# Altium PCB 0008-NSA_IR_Sync_Board.PcbDoc
Units mil, origin at the board's own origin, x right, y up, seen from the top; angles counter-clockwise.
Board outline 474 x 707 mil, 2 copper layers (Top Layer, Bottom Layer), stack 9.493 mil thick; 5 components, 5 nets, 15 pads, 1 vias.
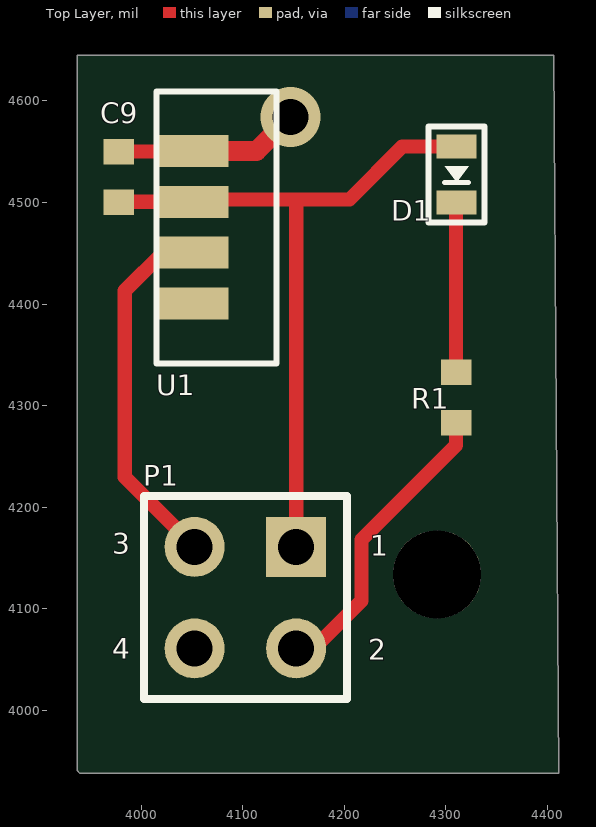
[diagram p0: Top Layer view]
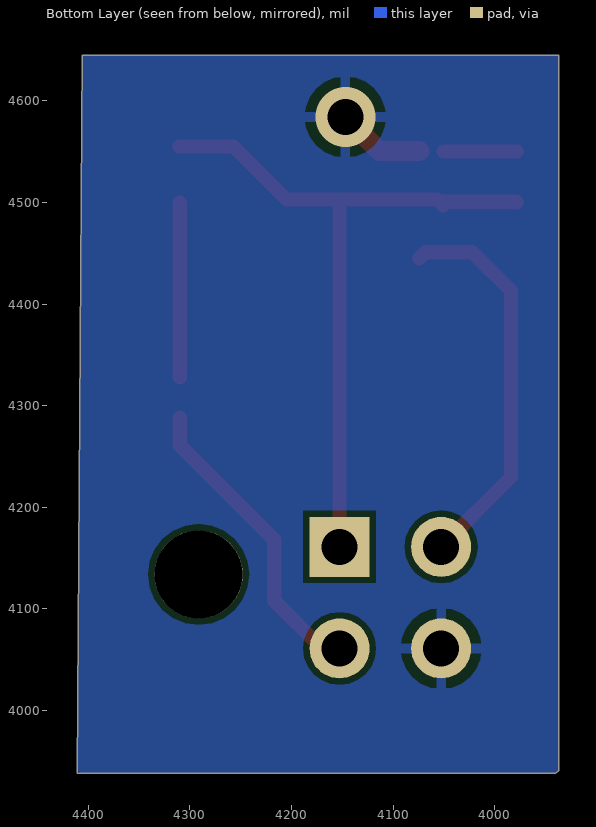
[diagram p1: Bottom Layer view, seen from below]
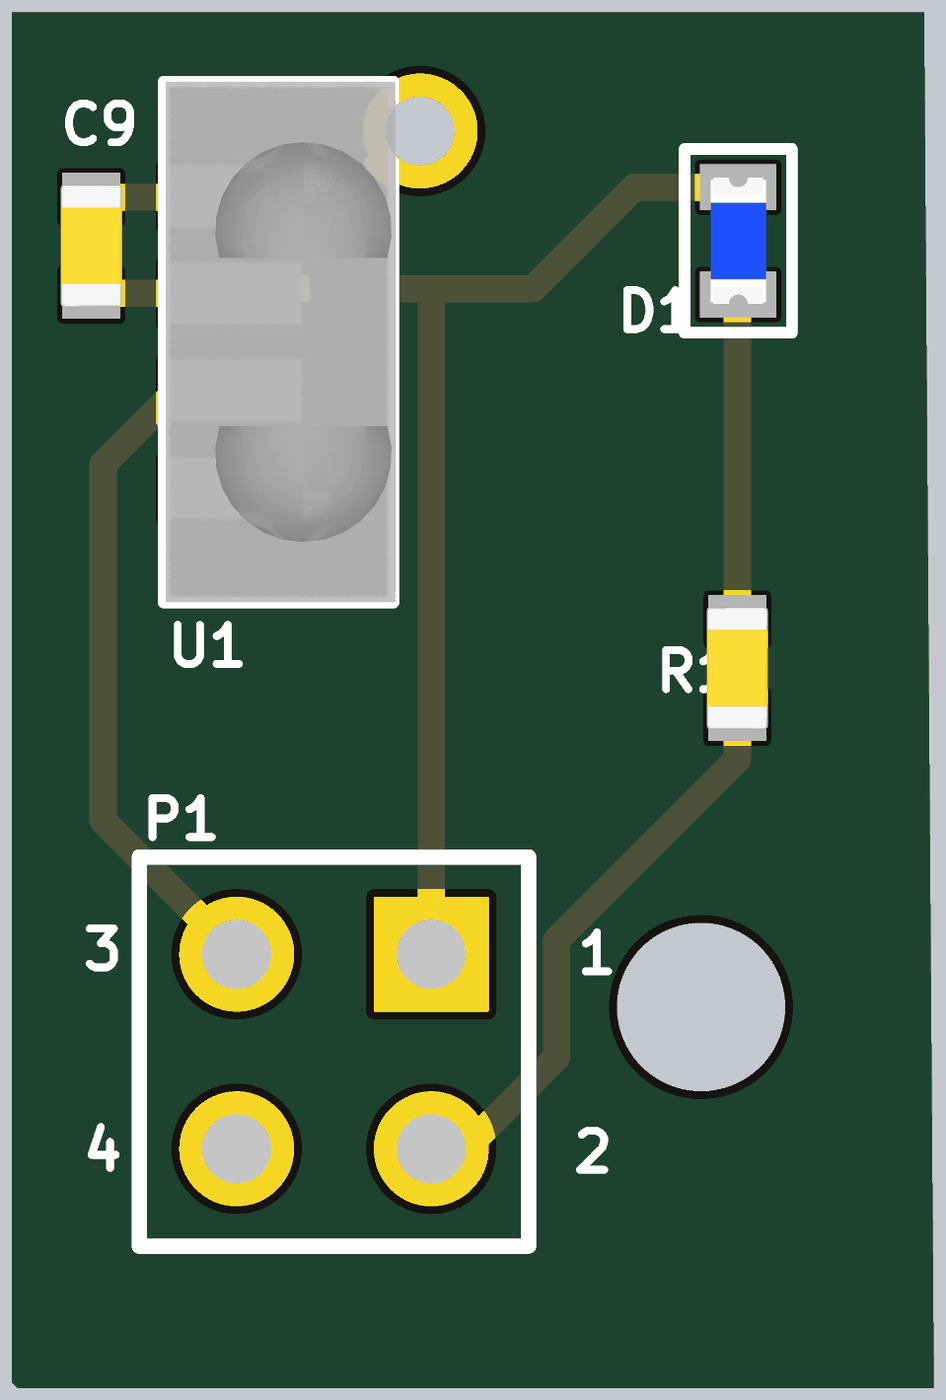
[diagram p2: 3D render of the assembled board from above, using the file's embedded part models]

## Layer stack, top to bottom
Top Layer: signal copper 1.4
Dielectric: prepreg 6.6929, FR-4, Dk 4.8
Bottom Layer: signal copper 1.4

## Board outline
4406,4645 3937,4645 3937,3941 3938,3940 3940,3938 4411,3938

## Design rules (kind name [scope] priority, off if disabled: settings)
Clearance [All] p1: gap=6
PolygonConnect [All] p1: connectstyle=Relief reliefconductorwidth=10 reliefentries=4 polygonreliefangle="90 Angle" airgapwidth=10
RoutingVias [All] p1: holewidth=12 width=24 viastyle="Through Hole" minholewidth=12 minwidth=24 maxholewidth=12 maxwidth=24
SolderMaskExpansion [All] p1: expansion=4
Width [All] p1: maxlimit=14 minlimit=8.15 preferedwidth=8.15 minimp=50.000000 maximp=50.000000 favimp=50.000000
28 further rules are at their usual default settings.

## Components (designator, comment, footprint, x,y, rotation, side; value= is the part's Value field where it differs from the comment)
C9 "0.1uF" RESISTOR_0603 3978,4525 r90 top
D1 "LED" LED_GREEN_0603 4310.43,4527.56 r270 top
P1 "Molex 901310122" 90131-0122 4152.67,4161 r180 top
R1 "510" RESISTOR_0603 4310,4308 r270 top
U1 "TSDP75T85N" TSDP75T85N 4074.21,4475.55 r270 top

## Footprints (in the part's own frame and the unit in brackets; to place one, negate y for a bottom-side part, rotate by r counter-clockwise, add the part's x,y. Pads: shape width x height; smd on the part's side, far side on the other; paste and mask are expansions set on the pad)
90131-0122 [mm] "Connector; Header; 2x2 Position"
  rect 1.5x1.5 hole 0.9: 1(0,0)
  round 1.5 hole 0.9: 2(0,2.54) 3(2.54,0) 4(2.54,2.54)
  silkscreen extent -1.27,-1.27 3.81,3.81, body extent -1.27,-1.27 3.81,3.81, height 9.25
LED_GREEN_0603 [mm]
  rect 0.6x1 smd mask+0.064: 1(-0.7,0) 2(0.7,0)
  silkscreen extent -1.2,-0.7 1.2,0.7, body extent -0.82,-0.36 0.82,0.36, height 0.68
RESISTOR_0603 [mil]
  rect 25x30 smd mask+2.5: 1(-25,0) 2(25,0)
  body extent -31,-16 31,16, height 22
TSDP75T85N [mm]
  rect 0.8x1.8 smd: 1(-1.905,-0.6) 2(-0.635,-0.6) 3(0.635,-0.6) 4(1.905,-0.6)
  silkscreen extent -3.4,-1.5 3.4,1.5, body extent -3.4,-1.48 3.4,1.52

## Part data
C9: library part "CAP, CERAMIC", "CAP CER 0.1UF 6.3V 20% X5R 0402"
D1: "LED, GREEN, 0603"
P1: library part "Header 2X2", "CONN HEADER 4POS .100\" STR TIN"
R1: library part RESISTOR, "RES 510 OHM 1/10W 1% 0603 SMD"
U1: "IR Receiver Modules for Remote Control Systems"

## Free pads (board coordinates)
  round 86.61 hole 86.61 unplated: 0(4291.34,4133.86)

## Via types
v1: diameter 59.06, hole 35.43, Top Layer to Bottom Layer, 1 vias

## Nets (pads, with @x,y where several pads share a name; then routed paths per layer and width w, separated by ;. In a path a pad name is that pad's centre, name@x,y a point inside that pad or via, vN(x,y) a via of type N, cw(c..) or ccw(c..) an arc to the next point about the centre after c; other vN are vias at no path point)
GND: C9.2 P1.4 U1.1 | length 159.5
  Top Layer w8.15: U1.1@4050.04,4550 U1.1
  Top Layer w14: C9.2 U1.1@4050.04,4550
  Top Layer w19.68: U1.1@4074.21,4550.55 4113.55,4550.55 v1(4147,4584)
IR_SYNC: P1.3 U1.3 | length 388.9
  Top Layer w14: P1.3 3984,4229.67 3984,4413 4022,4451 4068.21,4451 U1.3@4074.21,4445
NetD1_2: D1.2 R1.1 | length 171.6
  Top Layer w14: R1.1@4310,4328 D1.2@4310,4499.57
STATUS_LED: P1.2 R1.2 | length 303.7
  Top Layer w8.15: R1.2@4309,4287 R1.2@4310,4288
  Top Layer w14: P1.2 4170,4061 4217,4108 4217,4168 4310,4261 R1.2@4310,4288
VCC3V3D: C9.1 D1.1 P1.1 U1.2 | length 698.7
  Top Layer w14: C9.1 3978.55,4500.55 U1.2 ; U1.2@4050.59,4497 4056.59,4503 4152.67,4503 ; P1.1 4152.67,4503 ; D1.1 4257.12,4555.12 4205,4503 4152.67,4503
pads on no net: U1.4

## Polygon pours and split planes (outlines as drawn)
GND on Bottom Layer "GND" (solid, pour order 5): 4406,4645 3937,4645 3937,3941 3938,3940 3940,3938 4411,3938

## Silkscreen, mask and mechanical layers (free items; w line width, h text height)
Mechanical 2:
  lines w3.94: 3936.8,4495.79 3937.01,4496 ; 3937,3937 4409.45,3937.01 4409.45,4645.67 3937,4645.67 3937.01,3937.01

## Text inside footprints (layer, text, board x,y; h text height)
P1: Top Overlay "1" at 4225.67,4152 h20; Top Overlay "2" at 4223.67,4050 h20; Top Overlay "4" at 3971.67,4051 h20; Top Overlay "3" at 3971.67,4154 h20